# Altium PCB ScienceReceiverBoard.PcbDoc
Units mm, origin at the board's own origin, x right, y up, seen from the top; angles counter-clockwise.
Board outline 16.51 x 16.51 mm, 2 copper layers (Top Layer, Bottom Layer), stack 1.586 mm thick; 14 components, 9 nets, 50 pads, 15 vias.
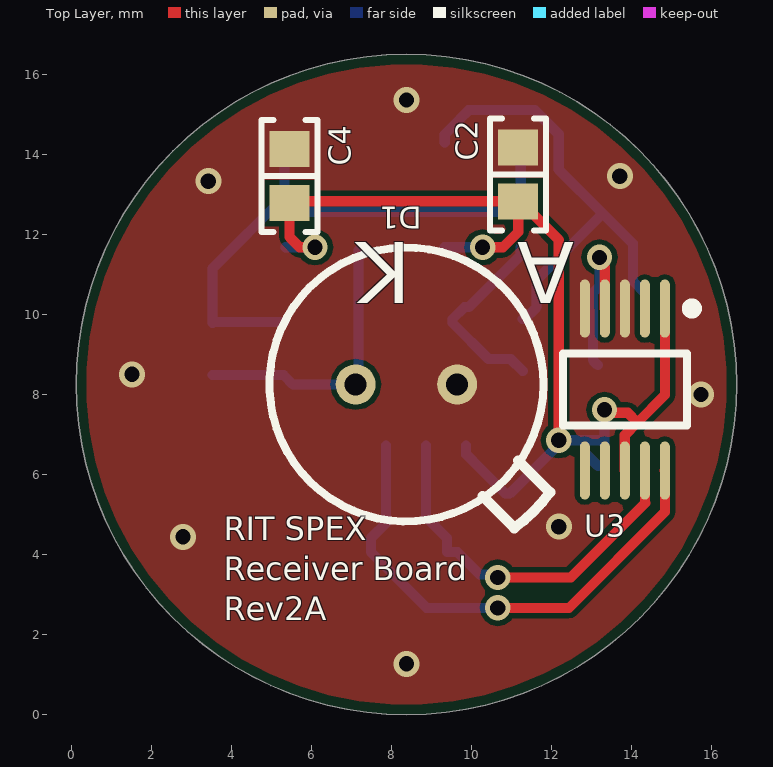
[diagram p0: Top Layer view]
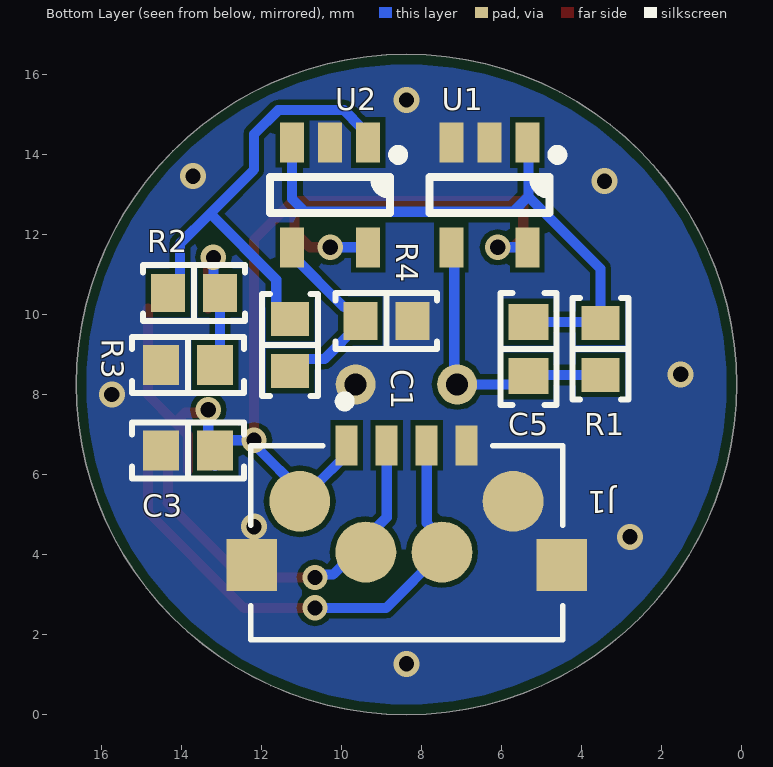
[diagram p1: Bottom Layer view, seen from below]
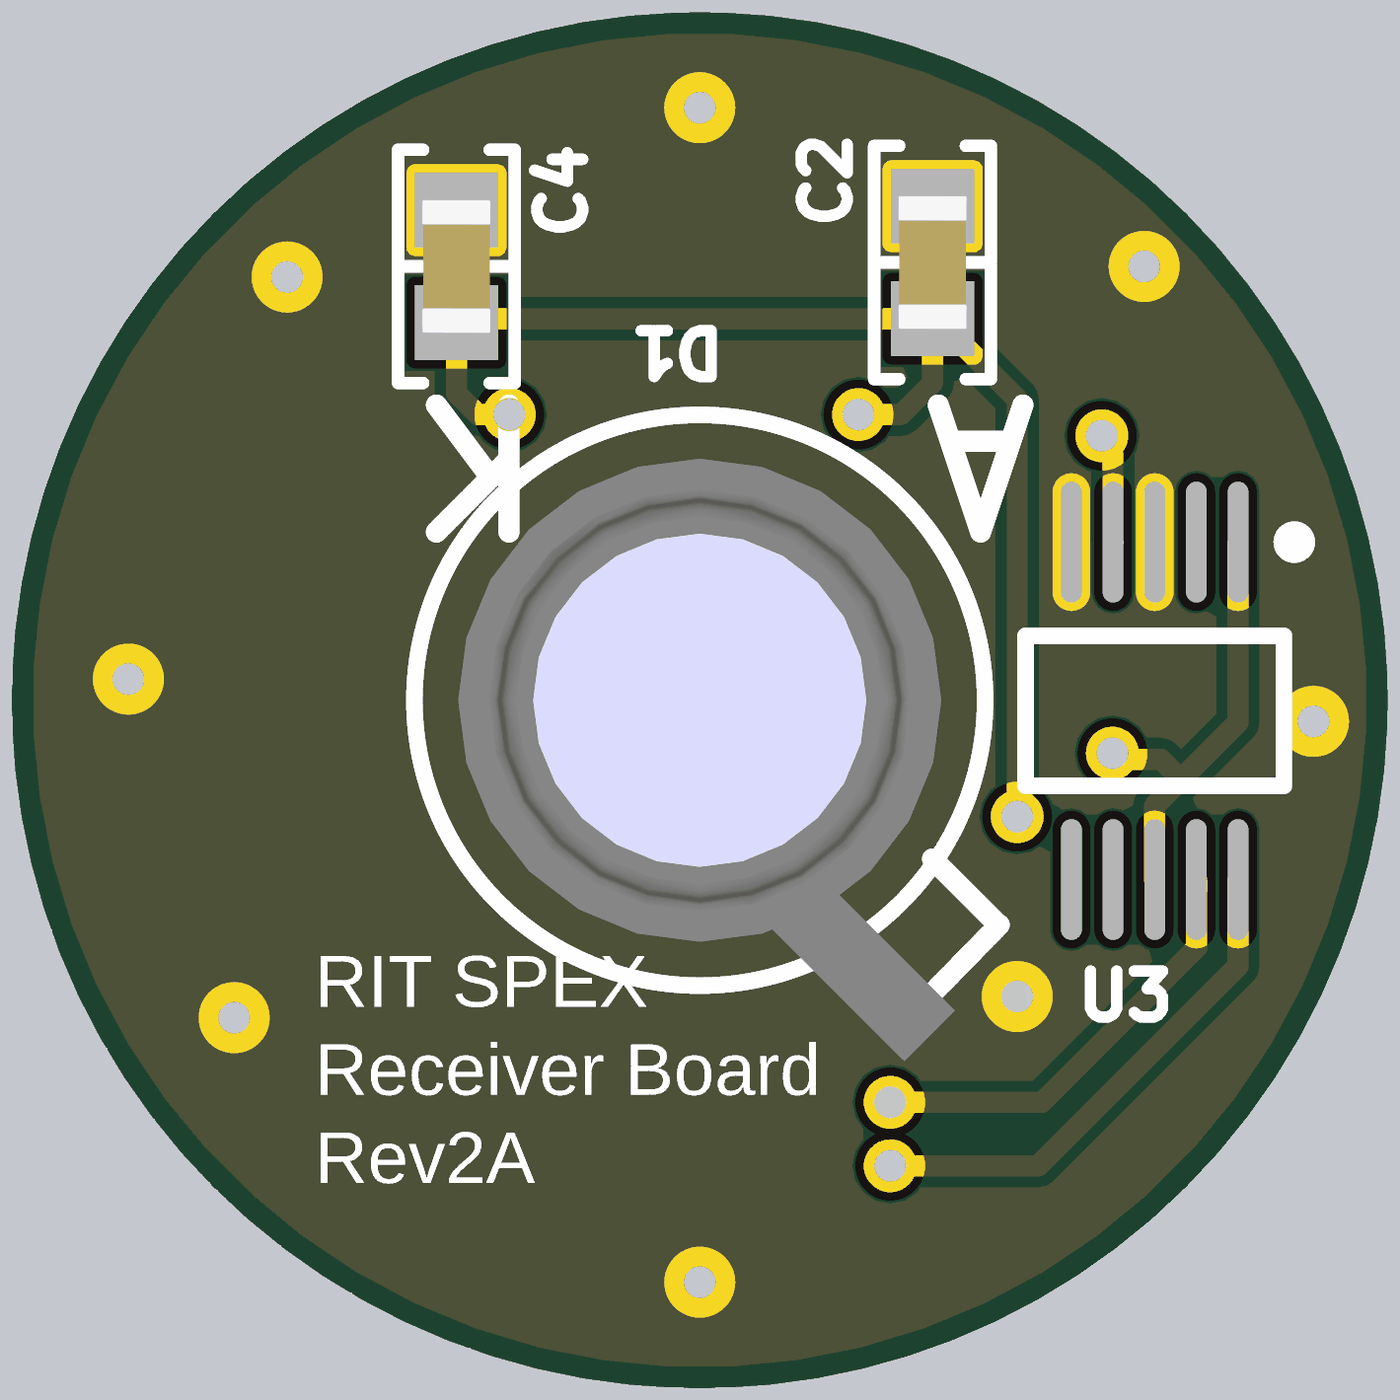
[diagram p2: 3D render of the assembled board from above, using the file's embedded part models]
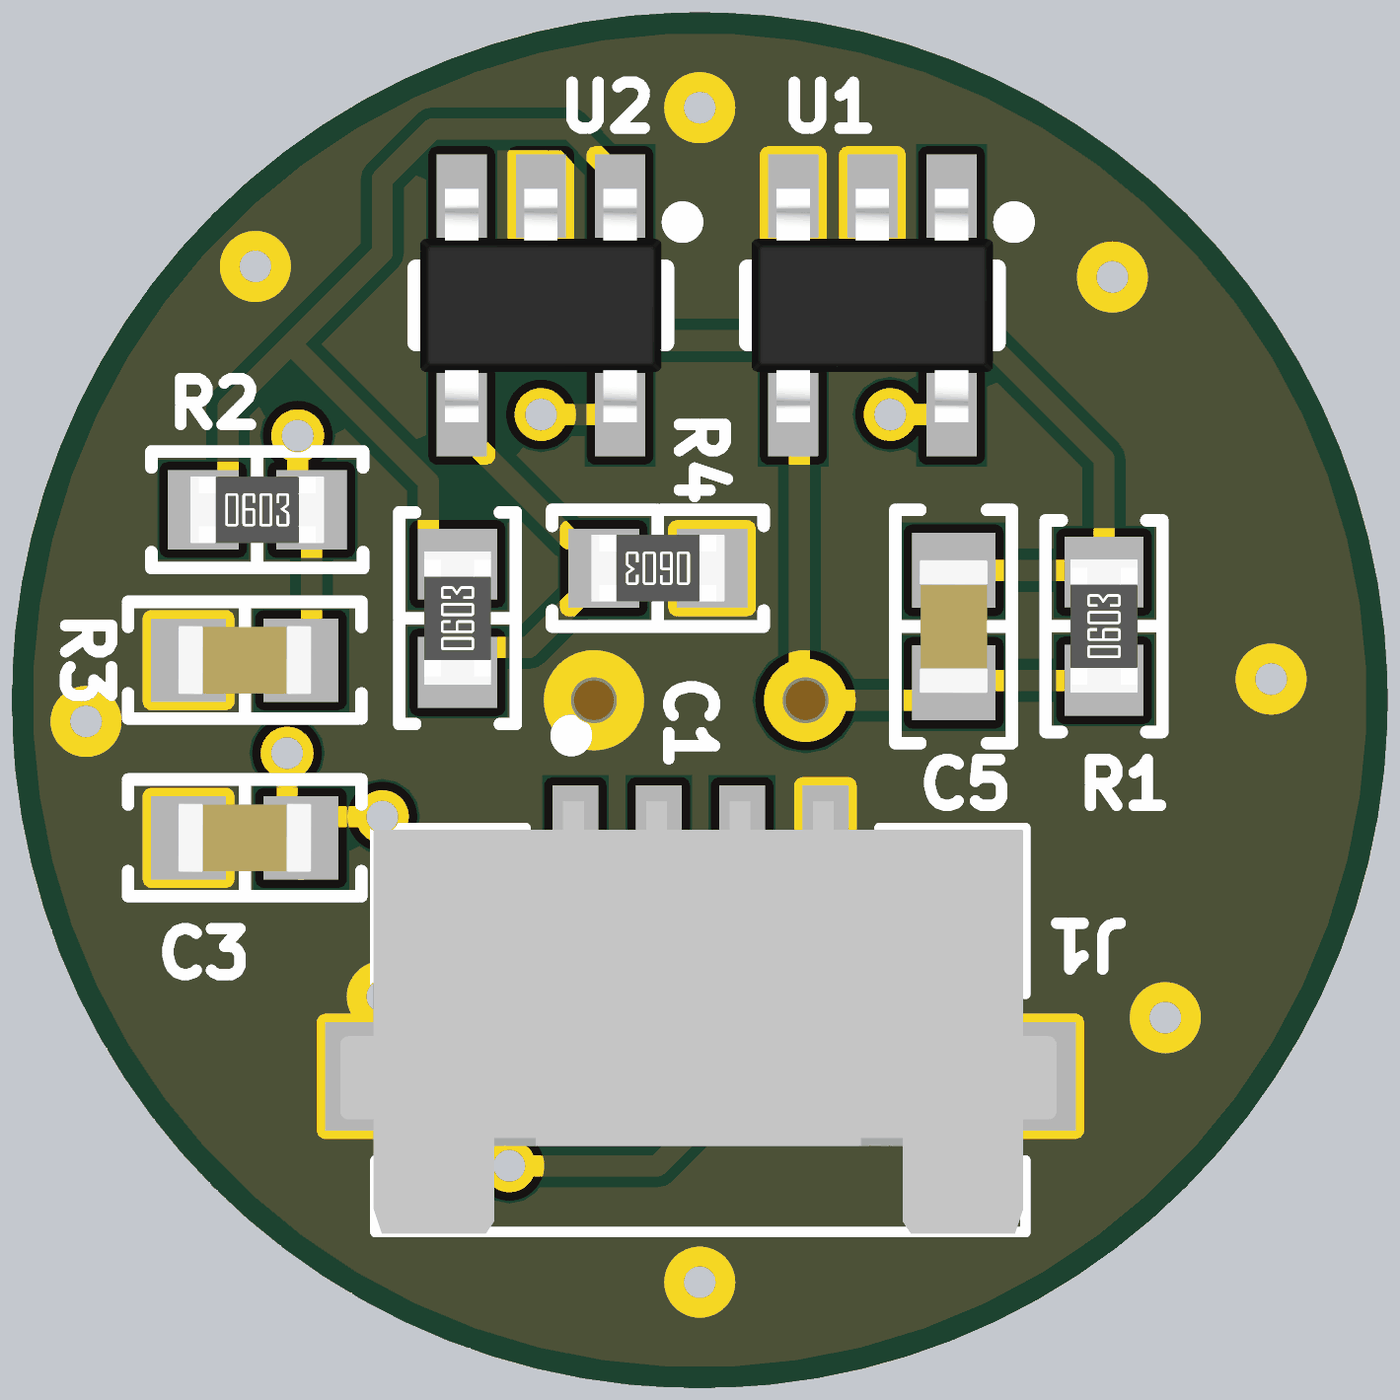
[diagram p3: 3D render of the assembled board from below, using the file's embedded part models]

## Layer stack, top to bottom
Top Solder: solder mask 0.0102, Solder Resist, Dk 3.5
Top Layer: signal copper 0.043
Dielectric 1: dielectric 1.5, FR-4, Dk 4.8
Bottom Layer: signal copper 0.043
Bottom Solder: solder mask 0.0102, Solder Resist, Dk 3.5

## Board outline
0.127,8.255 ccw(c8.382,8.255) 8.382,0 ccw(c8.382,8.255) 16.637,8.255 ccw(c8.382,8.255) 8.382,16.51 ccw(c8.382,8.255)

## Design rules (kind name [scope] priority, off if disabled: settings)
BoardOutlineClearance [All] p1: gap=0.254 ignorepadtopadclearanceinfootprint=FALSE
Clearance [All] p1: gap=0.127 ignorepadtopadclearanceinfootprint=FALSE
HoleSize [All] p1: absolutevalues=TRUE maxlimit=2.54 minlimit=0.254 maxpercent=80.000 minpercent=20.000
PolygonConnect PolygonConnect_5 [All vs IsNamedPolygon('Bottom Layer-GND') Or  IsNamedPolygon('Top Layer-GND')] p1: connectstyle=Direct reliefconductorwidth=0.254 reliefentries=4 polygonreliefangle="90 Angle" airgapwidth=0.254
PolygonConnect PolygonConnect_4 [All vs IsNamedPolygon('Bottom Layer-No Net')] p2: connectstyle=Direct reliefconductorwidth=0.254 reliefentries=4 polygonreliefangle="90 Angle" airgapwidth=0.254
PolygonConnect PolygonConnect_3 [All vs IsNamedPolygon('Top Layer-GND') Or  IsNamedPolygon('Bottom Layer-GND')] p3: thpad.connectstyle=Direct thpad.reliefconductorwidth=0.254 thpad.reliefentries=4 thpad.polygonreliefangle="90 Angle" thpad.airgapwidth=0.254 smdpad.connectstyle=Direct smdpad.reliefconductorwidth=0.254 smdpad.reliefentries=4 smdpad.polygonreliefangle="90 Angle" smdpad.airgapwidth=0.254 via.connectstyle=Relief via.reliefconductorwidth=0.254 via.reliefentries=4 via.polygonreliefangle="90 Angle" via.airgapwidth=0.254
PolygonConnect PolygonConnect_2 [All vs IsNamedPolygon('Top Layer-GND')] p4: thpad.connectstyle=Relief thpad.reliefconductorwidth=0.254 thpad.reliefentries=4 thpad.polygonreliefangle="90 Angle" thpad.airgapwidth=0.254 smdpad.connectstyle=Direct smdpad.reliefconductorwidth=0.254 smdpad.reliefentries=4 smdpad.polygonreliefangle="90 Angle" smdpad.airgapwidth=0.254 via.connectstyle=Relief via.reliefconductorwidth=0.254 via.reliefentries=4 via.polygonreliefangle="90 Angle" via.airgapwidth=0.254
PolygonConnect PolygonConnect_1 [All vs IsNamedPolygon('Bottom Layer-GND')] p5: thpad.connectstyle=Relief thpad.reliefconductorwidth=0.254 thpad.reliefentries=4 thpad.polygonreliefangle="90 Angle" thpad.airgapwidth=0.254 smdpad.connectstyle=Direct smdpad.reliefconductorwidth=0.254 smdpad.reliefentries=4 smdpad.polygonreliefangle="90 Angle" smdpad.airgapwidth=0.254 via.connectstyle=Relief via.reliefconductorwidth=0.254 via.reliefentries=4 via.polygonreliefangle="90 Angle" via.airgapwidth=0.254
PolygonConnect [All] p6: connectstyle=Relief reliefconductorwidth=0.254 reliefentries=4 polygonreliefangle="90 Angle" airgapwidth=0.254
RoomDefinition ScienceReceiverBoard [InComponentClass('ScienceReceiverBoard')] p1: confinementstyle=ConfineIn formatcopy=TRUE lockcomponents=FALSE outline -5.334,-1.016 21.209,-1.016 21.209,18.034 -5.334,18.034
RoutingVias [All] p1: holewidth=0.381 width=0.635 viastyle="Through Hole" minholewidth=0.254 minwidth=0.457 maxholewidth=0.762 maxwidth=1.27
SilkToSolderMaskClearance [IsPad] p1: minsilkscreentomaskgap=0.05 clearancetoexposedcopper=TRUE
SolderMaskExpansion [All] p1: expansion=0.102
Width [All] p1: maxlimit=0.254 minlimit=0.127 preferedwidth=0.254
28 further rules are at their usual default settings.

## Classes and differential pairs
component class ScienceReceiverBoard: C1 C2 C3 C4 C5 J1 R1 R2 R3 R4 U1 U2 U3

## Components (designator, comment, footprint, x,y, rotation, side; value= is the part's Value field where it differs from the comment)
C1 "0.1µF" "CAP 0603_1608" 13.843,6.604 r180 bottom
C2 "0.1µF" "CAP 0603_1608" 11.176,13.509 r270 top
C3 "0.1µF" "CAP 0603_1608" 13.843,8.737 r180 bottom
C4 "0.1µF" "CAP 0603_1608" 5.461,13.462 r270 top
C5 "10000pF" "CAP 0603_1608" 5.334,9.14 r90 bottom
D1 "GUVA-T11GD-L" "Genicom TO-46-2" 8.382,8.255 r180 top
J1 "SCH - CONNECTORS - 4 PIN + SHIELD" "PCB - CONNECTOR - MOLEX - PICO-LOCK 5037630491" 8.374,6.731 r180 bottom
R1 "169 kOhms" "RES 0603_1608" 3.53,9.144 r90 bottom
R2 "1 kOhms" "RES 0603_1608" 13.693,10.541 r180 bottom
R3 "18.7 kOhms" "RES 0603_1608" 11.289,9.24 r90 bottom
R4 "4.7 kOhms" "RES 0603_1608" 8.884,9.84 r0 bottom
U1 "AD8615AUJZ-REEL" "ANALOG TSOT-23-5 UJ-5" 6.309,12.994 r270 bottom
U2 "AD8615AUJZ-REEL" "ANALOG TSOT-23-5 UJ-5" 10.289,12.994 r270 bottom
U3 "ADS1014IDGST" TI-DGS10_L 13.843,8.128 r270 top

## Footprints (in the part's own frame and the unit in brackets; to place one, negate y for a bottom-side part, rotate by r counter-clockwise, add the part's x,y. Pads: shape width x height; smd on the part's side, far side on the other; paste and mask are expansions set on the pad)
"ANALOG TSOT-23-5 UJ-5" [mm] "SOT23, 5-Leads, Body 2.90x1.60mm, Pitch 0.95mm, IPC Medium Density"
  rect 1x0.6 smd: 1(-1.31,0.95) 2(-1.31,0) 3(-1.31,-0.95) 4(1.31,-0.95) 5(1.31,0.95)
  silkscreen extent -1.12,-1.5 0.45,1.82, body extent -1.4,-1.45 1.4,1.45, height 1
"CAP 0603_1608" [mm] "Chip Capacitor, 2-Leads, Body 1.60x0.80mm, IPC Medium Density"
  rect 0.9x1 smd: 1(-0.675,0) 2(0.675,0)
  silkscreen extent -1.4,-0.7 1.4,0.7, body extent -0.8,-0.41 0.8,0.41, height 0.82
"Genicom TO-46-2" [mm] "Genicom windowed TO-46-2"
  round 1 hole 0.55: 1(-1.27,0) 2(1.27,0)
  silkscreen extent -3.59,-3.42 3.42,3.59, body extent -3.06,-2.9 2.9,4.33, height 2.2
"PCB - CONNECTOR - MOLEX - PICO-LOCK 5037630491" [mm]
  rect 0.55x1 smd: 1(-1.5,0) 2(-0.5,0) 3(0.5,0) 4(1.5,0)
  rect 1.26x1.3 smd: S1(3.875,-2.99) S2(-3.875,-2.99)
  silkscreen extent -3.9,-4.86 3.9,1.2, body extent -4.32,-4.88 4.28,0.31, height 1.47
"RES 0603_1608" [mm] "Chip Resistor, 2-Leads, Body 1.60x0.80mm, IPC Medium Density"
  rect 0.85x0.95 smd: 1(-0.65,0) 2(0.65,0)
  silkscreen extent -1.27,-0.7 1.27,0.7, body extent -0.8,-0.4 0.8,0.4, height 0.45
TI-DGS10_L [mm] "SOP, 10-Leads, Body 3x3mm, Pitch 0.5mm, IPC High Density"
  oval 1.45x0.25 smd: 1(-2.025,1) 2(-2.025,0.5) 3(-2.025,0) 4(-2.025,-0.5) 5(-2.025,-1) 6(2.025,-1) 7(2.025,-0.5) 8(2.025,0) 9(2.025,0.5) 10(2.025,1)
  silkscreen extent -2.15,-1.55 0.9,1.8, body extent -1.55,-1.55 1.55,1.55, height 1.1

## Part data
C1 C2 C3 C4: library part CC0603JRX7R7BB104, "CAP CER 0.1UF 16V X7R 0603", Device Package="0603 (1608 Metric)", Manufacturer=Yageo, Operating Temperature="-55°C ~ 125°C", Supplier Part Number 1=311-1776-1-ND, Temperature Coefficient=X7R, Tolerance=±5%, Voltage - Rated=16V, Applications="General Purpose", Capacitance=0.1µF, ComponentLink1Description=Datasheet, ComponentLink1URL=https://www.yageo.com/upload/media/product/productsearch/datasheet/mlcc/UPY-GPHC_X7R_6.3V-to-50V_18.pdf, ComponentLink2Description="DigiKey Link", ComponentLink2URL=http://digikey.com/product-detail/en/yageo/CC0603JRX7R7BB104/311-1776-1-ND/5195678, LastUpdated="1/21/2020 12:02:05 AM", Lifecycle Status=Active, Minimum Order=1, Mounting Type="Surface Mount, MLCC", Package / Case="0603 (1608 Metric)", Packaging=TapeAndReel, PartId=5272, Part Number=CC0603JRX7R7BB104, Part Status=Active, Price=0.01, Series=CC, Size / Dimension="0.063\" L x 0.031\" W (1.60mm x 0.80mm)", Supplier 1=DigiKey, Thickness (Max)="0.035\" (0.90mm)"
C5: library part EMK107SD103JA-T, "CAP CER 10000PF 16V 0603", Device Package="0603 (1608 Metric)", Manufacturer="Taiyo Yuden", Operating Temperature="-55°C ~ 125°C", Supplier Part Number 1=587-1093-1-ND, Tolerance=±5%, Voltage - Rated=16V, Applications="RF, Microwave, High Frequency", Capacitance=10000pF, ComponentLink1Description=Datasheet, ComponentLink1URL=http://www.yuden.co.jp/productdata/catalog/mlcc07_e.pdf, ComponentLink2Description="DigiKey Link", ComponentLink2URL=http://digikey.com/product-detail/en/taiyo-yuden/EMK107SD103JA-T/587-1093-1-ND/930870, Features="Low Distortion", LastUpdated="1/21/2020 12:01:57 AM", Lifecycle Status=Active, Minimum Order=1, Mounting Type="Surface Mount, MLCC", Package / Case="0603 (1608 Metric)", Packaging=TapeAndReel, PartId=10137, Part Number=EMK107SD103JA-T, Part Status=Active, Price=0.07, Series=CFCAP™, Size / Dimension="0.063\" L x 0.031\" W (1.60mm x 0.80mm)", Supplier 1=DigiKey, Thickness (Max)="0.035\" (0.90mm)"
D1: library part PHOTODIODE, "Photodiode", Part Number=GUVA-T11GD-L
J1: "Connector Header Surface Mount, Right Angle 4 position 0.039 _1.00mm_", Package=None, Availability=Unavailable, MF=Molex, MP=5037630491, Price=None, SnapEDA_Link=https://www.snapeda.com/parts/5037630491/Molex/view-part/3215405/?ref=snap
R1: library part RMCF0603FT169K, "RES 169K OHM 1% 1/10W 0603", Device Package="0603 (1608 Metric)", Manufacturer="Stackpole Electronics Inc", Operating Temperature="-55°C ~ 155°C", Power (Watts)="0.1W, 1/10W", Ratings=AEC-Q200, Supplier Device Package=0603, Supplier Part Number 1=RMCF0603FT169KCT-ND, Temperature Coefficient=±100ppm/°C, Tolerance=±1%, ComponentLink1Description=Datasheet, ComponentLink1URL=https://www.seielect.com/catalog/sei-rmcf_rmcp.pdf, ComponentLink2Description="DigiKey Link", ComponentLink2URL=http://digikey.com/product-detail/en/stackpole-electronics-inc/RMCF0603FT169K/RMCF0603FT169KCT-ND/2417939, Composition="Thick Film", Features="Automotive AEC-Q200", Height - Seated (Max)="0.022\" (0.55mm)", LastUpdated="1/21/2020 12:20:18 AM", Lifecycle Status=Active, Minimum Order=1, Number of Terminations=2, Package / Case="0603 (1608 Metric)", Packaging=CutTape, PartId=16369, Part Number=RMCF0603FT169K, Part Status=Active, Price=0.10, Resistance="169 kOhms", Series=RMCF, Size / Dimension="0.061\" L x 0.031\" W (1.55mm x 0.80mm)", Supplier 1=DigiKey
R2: library part RNCP0603FTD1K00, "RES 1K OHM 1% 1/8W 0603", Device Package="0603 (1608 Metric)", Manufacturer="Stackpole Electronics Inc", Operating Temperature="-55°C ~ 155°C", Power (Watts)="0.125W, 1/8W", Supplier Device Package=0603, Supplier Part Number 1=RNCP0603FTD1K00CT-ND, Temperature Coefficient=±100ppm/°C, Tolerance=±1%, ComponentLink1Description=Datasheet, ComponentLink1URL=https://www.seielect.com/catalog/sei-rncp.pdf, ComponentLink2Description="DigiKey Link", ComponentLink2URL=http://digikey.com/product-detail/en/stackpole-electronics-inc/RNCP0603FTD1K00/RNCP0603FTD1K00CT-ND/2240445, Composition="Thin Film", Features="Anti-Sulfur, Moisture Resistant", Height - Seated (Max)="0.020\" (0.50mm)", LastUpdated="1/21/2020 12:24:38 AM", Lifecycle Status=Active, Minimum Order=1, Number of Terminations=2, Package / Case="0603 (1608 Metric)", Packaging=TapeAndReel, PartId=5694, Part Number=RNCP0603FTD1K00, Part Status=Active, Price=0.01, Resistance="1 kOhms", Series=RNCP, Size / Dimension="0.059\" L x 0.031\" W (1.50mm x 0.80mm)", Supplier 1=DigiKey
R3: library part RMCF0603FT18K7, "RES 18.7K OHM 1% 1/10W 0603", Device Package="0603 (1608 Metric)", Manufacturer="Stackpole Electronics Inc", Operating Temperature="-55°C ~ 155°C", Power (Watts)="0.1W, 1/10W", Ratings=AEC-Q200, Supplier Device Package=0603, Supplier Part Number 1=RMCF0603FT18K7CT-ND, Temperature Coefficient=±100ppm/°C, Tolerance=±1%, ComponentLink1Description=Datasheet, ComponentLink1URL=https://www.seielect.com/catalog/sei-rmcf_rmcp.pdf, ComponentLink2Description="DigiKey Link", ComponentLink2URL=http://digikey.com/product-detail/en/stackpole-electronics-inc/RMCF0603FT18K7/RMCF0603FT18K7CT-ND/2417955, Composition="Thick Film", Features="Automotive AEC-Q200", Height - Seated (Max)="0.022\" (0.55mm)", LastUpdated="1/21/2020 12:20:29 AM", Lifecycle Status=Active, Minimum Order=1, Number of Terminations=2, Package / Case="0603 (1608 Metric)", Packaging=CutTape, PartId=16008, Part Number=RMCF0603FT18K7, Part Status=Active, Price=0.10, Resistance="18.7 kOhms", Series=RMCF, Size / Dimension="0.061\" L x 0.031\" W (1.55mm x 0.80mm)", Supplier 1=DigiKey
R4: library part RMCF0603FT4K70, "RES 4.7K OHM 1% 1/10W 0603", Device Package="0603 (1608 Metric)", Manufacturer="Stackpole Electronics Inc", Operating Temperature="-55°C ~ 155°C", Power (Watts)="0.1W, 1/10W", Ratings=AEC-Q200, Supplier Device Package=0603, Supplier Part Number 1=RMCF0603FT4K70CT-ND, Temperature Coefficient=±100ppm/°C, Tolerance=±1%, ComponentLink1Description=Datasheet, ComponentLink1URL=https://www.seielect.com/catalog/sei-rmcf_rmcp.pdf, ComponentLink2Description="DigiKey Link", ComponentLink2URL=http://digikey.com/product-detail/en/stackpole-electronics-inc/RMCF0603FT4K70/RMCF0603FT4K70CT-ND/1943033, Composition="Thick Film", Features="Automotive AEC-Q200", Height - Seated (Max)="0.022\" (0.55mm)", LastUpdated="1/21/2020 12:24:32 AM", Lifecycle Status=Active, Minimum Order=1, Number of Terminations=2, Package / Case="0603 (1608 Metric)", Packaging=CutTape, PartId=6078, Part Number=RMCF0603FT4K70, Part Status=Active, Price=0.10, Resistance="4.7 kOhms", Series=RMCF, Size / Dimension="0.061\" L x 0.031\" W (1.55mm x 0.80mm)", Supplier 1=DigiKey
U1 U2: "IC OPAMP GP 1 CIRCUIT TSOT23-5", Current - Input Bias=0.2pA, Current - Output / Channel=150mA, Current - Supply=1.7mA, Device Package="SOT-23-5 Thin, TSOT-23-5", Manufacturer="Analog Devices Inc.", Operating Temperature="-40°C ~ 125°C", Supplier Device Package=TSOT-23-5, Supplier Part Number 1=AD8615AUJZ-REELTR-ND, Voltage - Input Offset=23µV, Voltage - Supply, Single/Dual (±)="2.7V ~ 5.5V, ±1.35V ~ 2.75V", Amplifier Type="General Purpose", ComponentLink1Description=Datasheet, ComponentLink1URL=https://www.analog.com/media/en/technical-documentation/data-sheets/AD8615_8616_8618.pdf, ComponentLink2Description="DigiKey Link", ComponentLink2URL=//digikey.com/product-detail/en/analog-devices-inc/AD8615AUJZ-REEL/AD8615AUJZ-REELTR-ND/993826, Gain Bandwidth Product=24MHz, LastUpdated="12/9/2019 2:06:44 AM", Lifecycle Status=0, Minimum Order=1, Mounting Type="Surface Mount", Number of Circuits=1, Output Type=Rail-to-Rail, Package / Case="SOT-23-5 Thin, TSOT-23-5", Packaging=TapeAndReel, PartId=5, Part Number=AD8615AUJZ-REEL, Part Status=Active, Price=1.06, Series=DigiTrim®, Slew Rate=12V/µs, Supplier 1=DigiKey
U3: library part CMP-0003-00375-2, "12-Bit ADC with Integrated PGA, Comparator, Oscillator, and Reference, -40 to 125 degC, 10-pin SOP (DGS10), Green (RoHS & no Sb/Br)", Analog Voltage AV/DD(Max)(V)=5.5, Analog Voltage AV/DD(Min)(V)=2, Manufacturer="Texas Instruments", # Input Channels=1, Architecture=Delta-Sigma, Code_JEDEC=MO-153, ComponentLink1Description="Manufacturer URL", ComponentLink1URL=http://www.ti.com/, ComponentLink2Description=Datasheet, ComponentLink2URL=http://www.ti.com/general/docs/lit/getliterature.tsp?genericPartNumber=ADS1014&fileType=pdf, ComponentLink3Description="Package Specification", ComponentLink3URL=http://www.ti.com/lit/ml/mpds035b/mpds035b.pdf, DatasheetVersion=SBAS473C, Digital Supply(Max)(V)=5.5, Digital Supply(Min)(V)=2, Eco-Plan="Green (RoHS & no Sb/Br)", INL(Max)(+/-LSB)=0.5, Interface="Serial I2C", Mounting Technology="Surface Mount", PackageDescription="10-Pin Plastic Small Outline, Body 3 x 3 mm, Pitch 0.5 mm", PackageReference=DGS10, PackageVersion="4073272/C, 02/2004", PartNumber=ADS1014IDGST, Resolution(Bits)=12, Sample Rate (max)(SPS)=3.3k, SubFamily="Precision ADC (<=10MSPS)"

## Free pads (board coordinates)
  round 1.524 smd far side: 2(5.715,5.334) 3(9.398,4.064) 4(7.493,4.064) 5(11.049,5.334)

## Via types
v1: diameter 0.65, hole 0.381, Top Layer to Bottom Layer, 8 vias
v2: diameter 0.635, hole 0.381, Top Layer to Bottom Layer, 7 vias

## Nets (pads, with @x,y where several pads share a name; then routed paths per layer and width w, separated by ;. In a path a pad name is that pad's centre, name@x,y a point inside that pad or via, vN(x,y) a via of type N, cw(c..) or ccw(c..) an arc to the next point about the centre after c; other vN are vias at no path point)
+5: C1.2 C2.2 C4.2 J1.1 pad.5 U1.5 U2.5 U3.1 U3.8 | length 28.8
  Top Layer w0.254: C4.2@5.359,12.954 5.479,12.834 C2.2 ; C4.2 5.461,11.938 5.715,11.684 v2(6.096,11.684) ; v2(10.287,11.684) 10.795,11.684 11.176,12.065 C2.2 ; v2(12.192,6.858) 12.192,11.868 11.226,12.834 C2.2 ; v2(13.335,7.62) 13.408,7.547 13.916,7.547 14.159,7.304 ; U3.8@13.841,6.101 U3.8 13.841,6.105 13.841,6.987 14.159,7.304 ; U3.1 14.843,7.989 14.159,7.304
  Bottom Layer w0.254: U1.5 v2(6.096,11.684) ; U2.5 v2(10.287,11.684) ; J1.1 9.874,6.506 10.238,6.142 10.241,6.142 10.858,5.524 10.962,5.524 12.192,6.755 v2(12.192,6.858) 13.248,6.858 13.335,6.771 v2(13.335,7.62) ; C1.2@12.914,6.477 C1.2@13.168,6.223
GND: C1.1 C2.1 C3.1 C4.1 D1.1 J1.4 J1.S1 J1.S2 pad.2 R4.1 U1.2 U1.3 U2.2 U3.3 U3.5
  other v1: 8.382,1.27 2.794,4.445 12.192,4.699 15.748,8.001 1.524,8.509 3.429,13.335 13.716,13.462 8.382,15.367
NetC3_2: C3.2 R2.2 U3.4 | length 4.1
  Top Layer w0.254: v2(13.208,11.43) 13.208,11.327 13.341,11.194 13.341,10.155 U3.4
  Bottom Layer w0.254: C3.2 13.043,8.862 R2.2 13.208,10.706 v2(13.208,11.43)
NetC5_1: C5.1 D1.2 R1.1 U1.4 | length 7.2
  Bottom Layer w0.254: R1.1 5.305,8.494 C5.1 5.544,8.255 D1.2 7.186,8.329 7.186,11.61 U1.4
NetC5_2: C5.2 R1.2 U1.1 U2.3 | length 14.7
  Bottom Layer w0.254: C5.2 3.55,9.815 R1.2 3.53,11.15 5.334,12.954 ; U1.1 5.334,14.279 5.334,12.954 ; U2.3 11.239,12.89 10.922,12.573 5.715,12.573 5.334,12.954
NetJ1_2: J1.2 pad.3 U3.9 | length 9.7
  Top Layer w0.254: v2(10.668,3.429) 12.49,3.429 14.351,5.29 14.345,5.296 14.345,6.101 U3.9
  Bottom Layer w0.254: J1.2 8.874,4.932 9.398,4.408 pad.3 9.652,4.064 10.214,3.502 10.595,3.502 v2(10.668,3.429)
NetJ1_3: J1.3 pad.4 U3.10 | length 12.8
  Top Layer w0.254: v2(10.668,2.667) 12.446,2.667 14.843,5.064 U3.10 U3.10@14.841,6.101
  Bottom Layer w0.254: J1.3 7.874,4.789 7.493,4.408 pad.4 8.89,2.667 v2(10.668,2.667)
NetR2_1: R2.1 R3.2 U2.1 | length 11.9
  Bottom Layer w0.254: U2.1 9.339,14.504 9.735,14.9 9.735,14.909 9.939,15.113 11.589,15.113 12.192,14.51 12.192,13.626 13.29,12.528 ; R3.2 11.339,9.89 11.637,10.188 11.637,10.875 13.29,12.528 ; R2.1 14.045,10.839 14.045,11.773 13.29,12.528
NetR3_1: R3.1 R4.2 U2.4 | length 4.9
  Bottom Layer w0.254: U2.4 11.239,11.484 9.942,10.188 9.832,10.188 9.534,9.89 R4.2 9.534,9.79 10.436,8.888 10.991,8.888 R3.1
pads on no net: U3.2 U3.6 U3.7

## Polygon pours and split planes (outlines as drawn)
GND on Bottom Layer "Bottom Layer-GND" (solid, pour order 6): 4.064,16.764 -1.588,12.945 1.077,-0.254 12.573,-0.254 17.309,4.482 17.309,12.028 12.573,16.764
no net on Bottom Layer "Bottom Layer-No Net" (solid, pour order 4): -1.46,16.828
no net on Bottom Layer "Bottom Layer-No Net 1" (solid, pour order 2): 1.905,16.764
GND on Top Layer "Top Layer-GND" (solid, pour order 0): 3.998,16.703 -0.892,13.084 0.569,-0.315 12.507,-0.315 17.206,4.384 17.206,12.004 12.507,16.703

## Silkscreen, mask and mechanical layers (free items; w line width, h text height)
Top Overlay:
  text "A    K" at 12.573,11.811 h1.52 r180
  text "RIT SPEX / Receiver Board / Rev2A" at 3.81,2.159 h1
Mechanical 2:
  circle w0.013: c-59.493,-50.603 r0.826
  circle w0.006: c-59.493,-50.603 r0.003
  circle w0.013: c-60.298,-51.408 r0.021
  circle w0.006: c-60.298,-51.408 r0.003
Mechanical 15:
  circle w0.254: c8.382,8.255 r8.255